# Altium PCB AMG8833convert.PcbDoc
Units mil, origin at the board's own origin, x right, y up, seen from the top; angles counter-clockwise.
Board outline 380.03 x 710.03 mil, 2 copper layers (Top Layer, Bottom Layer); 2 components, 4 nets, 10 pads, 0 vias.
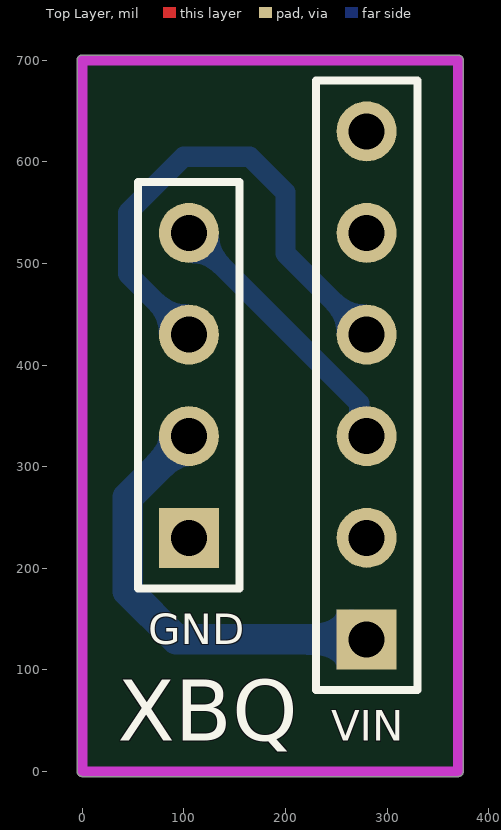
[diagram p0: Top Layer view]
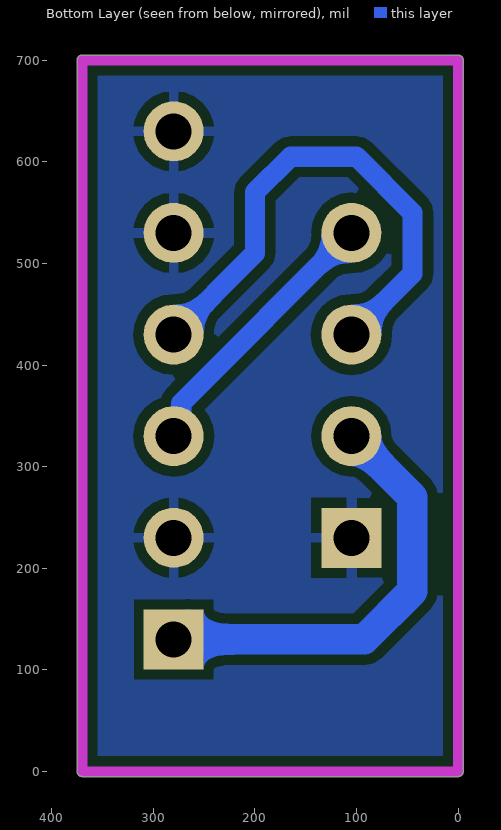
[diagram p1: Bottom Layer view, seen from below]

## Layer stack, top to bottom
Top Solder: solder mask 0.4, Solder Resist, Dk 3.5
Top Layer: signal copper 1.4
Dielectric 1: dielectric 12.6, FR-4, Dk 4.8
Bottom Layer: signal copper 1.4
Bottom Solder: solder mask 0.4, Solder Resist, Dk 3.5

## Board outline
0,-5.01 cw(c0,0) -5.01,0 -5.01,700 cw(c0,700) 0,705.02 370,705.02 cw(c370,700) 375.02,700 375.02,0 cw(c370,0) 370,-5.01

## Design rules (kind name [scope] priority, off if disabled: settings)
Clearance [All] p1: gap=10 ignorepadtopadclearanceinfootprint=FALSE except(0: Arc-Hole Track-Hole SMDPad-Hole THPad-Hole Via-Hole Fill-Hole Poly-Hole Region-Hole Text-Hole)
PolygonConnect [All] p1: connectstyle=Relief reliefconductorwidth=10 reliefentries=4 polygonreliefangle="90 Angle" airgapwidth=10
RoutingVias [All] p1: holewidth=28 width=50 viastyle="Through Hole" minholewidth=28 minwidth=50 maxholewidth=28 maxwidth=50
SolderMaskExpansion [All] p1: expansion=4
Width [All] p1: maxlimit=30 minlimit=10 preferedwidth=20 minimp=50.000000 maximp=50.000000 favimp=50.000000
30 further rules are at their usual default settings.

## Components (designator, comment, footprint, x,y, rotation, side; value= is the part's Value field where it differs from the comment)
P1 "Header 4" HDR1X4 105,230 r90 top
P2 "Header 6" HDR1X6 280,130 r90 top

## Footprints (in the part's own frame and the unit in brackets; to place one, negate y for a bottom-side part, rotate by r counter-clockwise, add the part's x,y. Pads: shape width x height; smd on the part's side, far side on the other; paste and mask are expansions set on the pad)
HDR1X4 [mm] "Connector; Header; 4 Position"
  rect 1.5x1.5 hole 0.9: 1(0,0)
  round 1.5 hole 0.9: 2(2.54,0) 3(5.08,0) 4(7.62,0)
  silkscreen extent -1.27,-1.27 8.89,1.27
HDR1X6 [mm] "Connector; Header; 6 Position"
  rect 1.5x1.5 hole 0.9: 1(0,0)
  round 1.5 hole 0.9: 2(2.54,0) 3(5.08,0) 4(7.62,0) 5(10.16,0) 6(12.7,0)
  silkscreen extent -1.27,-1.27 13.97,1.27

## Part data
P1: "Header, 4-Pin", LatestRevisionDate=17-Jul-2002, LatestRevisionNote="Re-released for DXP Platform.", Publisher="Altium Limited"
P2: "Header, 6-Pin", LatestRevisionDate=17-Jul-2002, LatestRevisionNote="Re-released for DXP Platform.", Publisher="Altium Limited"

## Nets (pads, with @x,y where several pads share a name; then routed paths per layer and width w, separated by ;. In a path a pad name is that pad's centre, name@x,y a point inside that pad or via, vN(x,y) a via of type N, cw(c..) or ccw(c..) an arc to the next point about the centre after c; other vN are vias at no path point)
GND: P1.1 P2.2 P2.5 P2.6
SCL: P1.4 P2.3 | length 277.5
  Bottom Layer w10: P1.4@105,527.5 P1.4 ; P2.3 P2.3@280,332.5
  Bottom Layer w20: P1.4 272.53,362.47 272.53,337.47 P2.3
SDA: P1.3 P2.4 | length 520.3
  Bottom Layer w10: P1.3@95,430 P1.3
  Bottom Layer w20: P1.3 45,490 45,550 100,605 165,605 200,570 200,510 P2.4
VCC3V3: P1.2 P2.1 | length 457.5
  Bottom Layer w10: P1.2@105,325 P1.2
  Bottom Layer w30: P1.2 45,270 45,177.57 92.57,130 P2.1 P2.1@265.47,144.53

## Polygon pours and split planes (outlines as drawn)
GND on Bottom Layer " " (solid, pour order 8): 0,700 0,0 370,0 370,700

## Keep-outs
Keep-Out Layer:
  lines w10: 0,0 370,0 370,700 0,700 0,0

## Silkscreen, mask and mechanical layers (free items; w line width, h text height)
Top Overlay:
  text "GND" at 65,125 h30
  text "XBQ" at 35,30 h60
  text "VIN" at 245,30 h30

## Dimensions
0,700 to 370,700 on Top Overlay
0,700 to 0,0 on Top Overlay